# Altium PCB PCB1.PcbDoc (part 1 of 2)
Units mil, origin at the board's own origin, x right, y up, seen from the top; angles counter-clockwise.
Board outline 3200 x 1060 mil, 4 copper layers (Top Layer, Ground plane, Power plane, Bottom Layer); 179 components, 88 nets, 587 pads, 145 vias.
Unrouted connection lines stored in the file: 233.
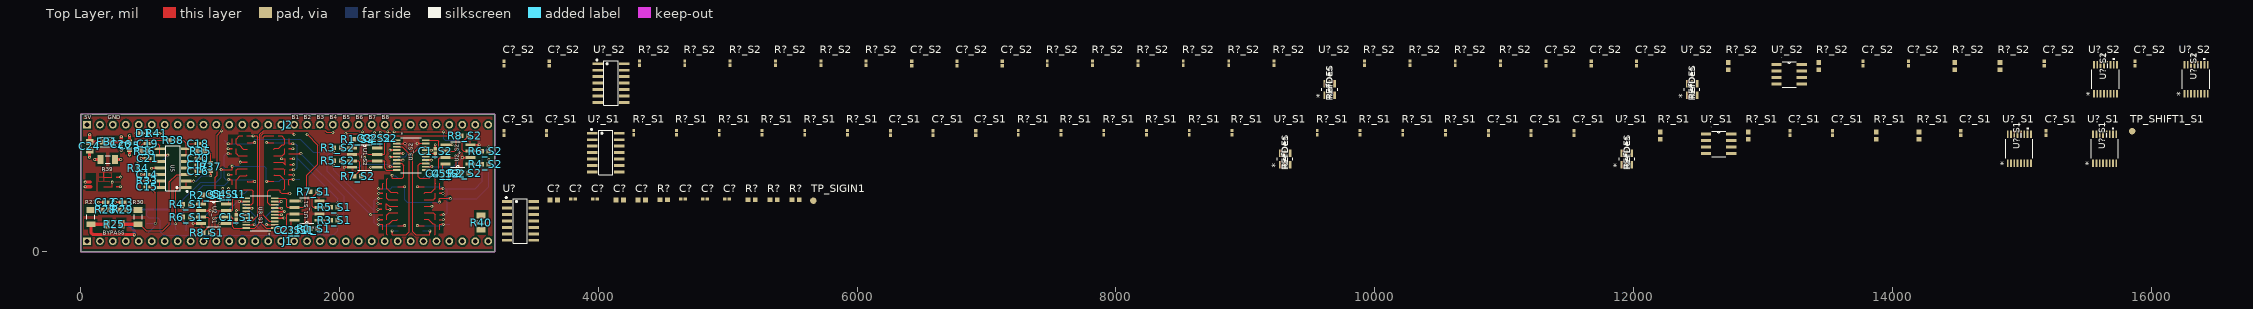
[diagram p0: Top Layer view]
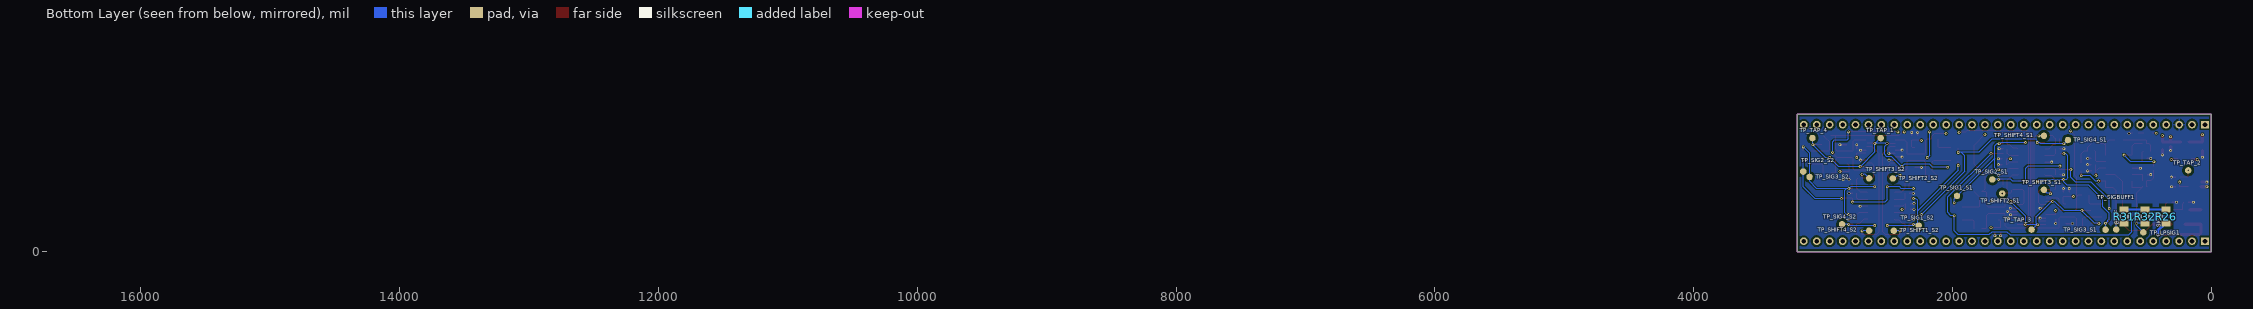
[diagram p1: Bottom Layer view, seen from below]
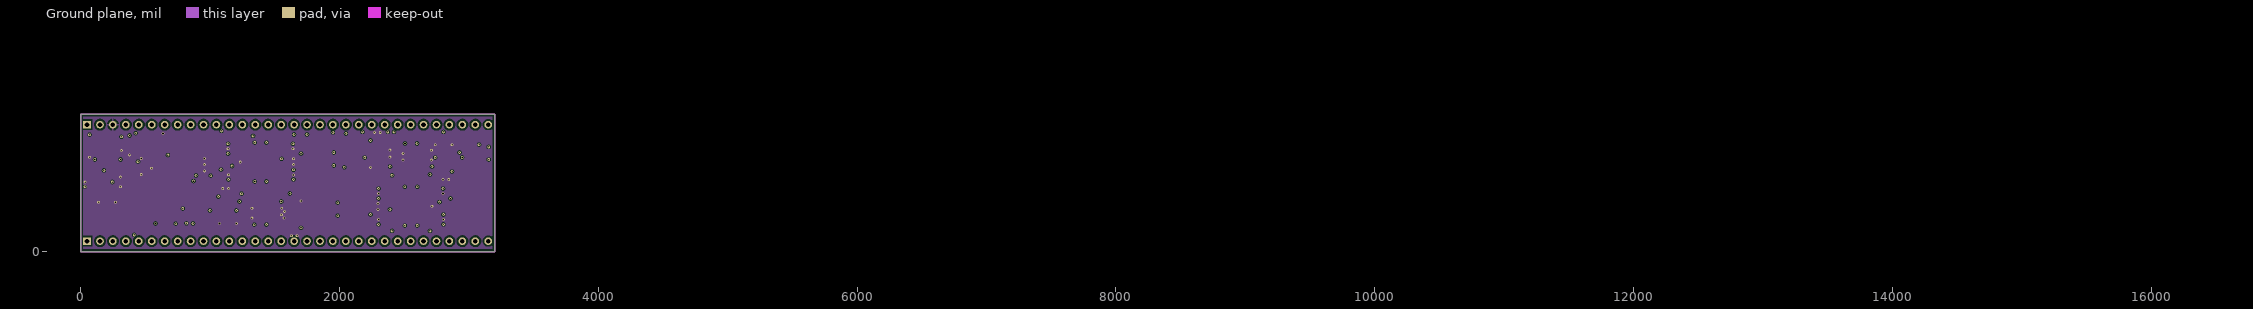
[diagram p2: Ground plane]
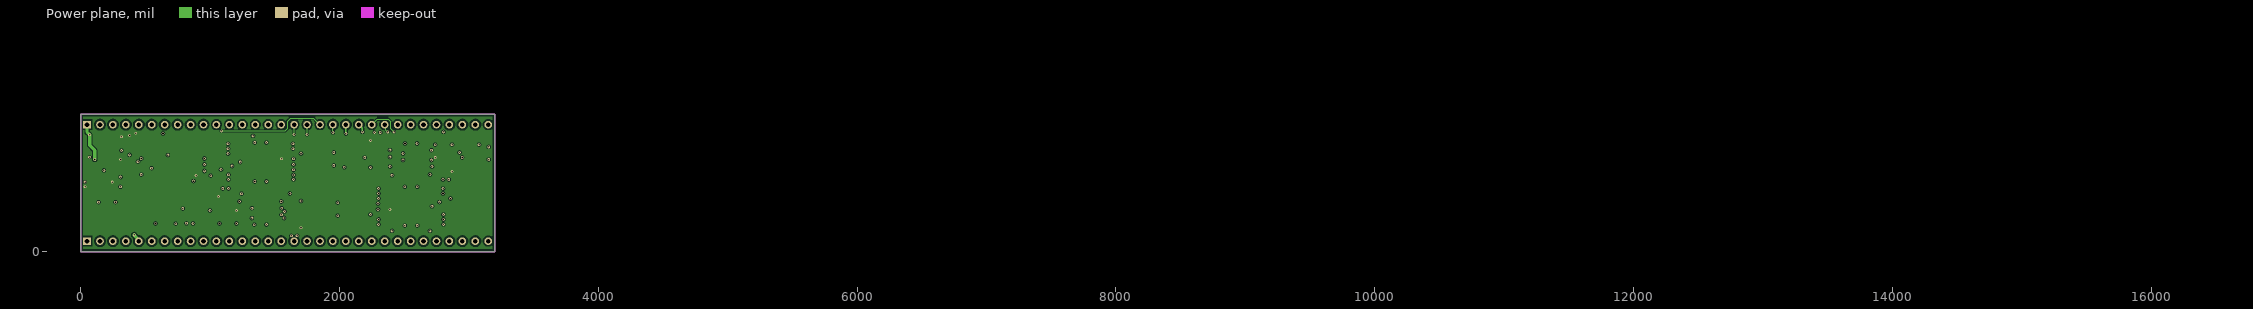
[diagram p3: Power plane]

## Layer stack, top to bottom
Top Solder: solder mask 0.4, Solder Resist, Dk 3.3
Top Layer: signal copper 1.4
Dielectric 1: prepreg 12.6, PP-006, Dk 4.1
Ground plane: signal copper 0.689
Dielectric1: core 12.6, FR-4, Dk 4.3
Power plane: signal copper 0.689
Dielectric 2: prepreg 12.6, PP-006, Dk 4.1
Bottom Layer: signal copper 1.4
Bottom Solder: solder mask 0.4, Solder Resist, Dk 3.3

## Board outline
0,0 3200,0 3200,1060 0,1060

## Design rules (kind name [scope] priority, off if disabled: settings)
Clearance Clearance_Poly_Via [InPoly vs IsVia] p1: gap=5 ignorepadtopadclearanceinfootprint=FALSE except(0: Arc-Hole Track-Hole SMDPad-Hole THPad-Hole Via-Hole Fill-Hole Poly-Hole Region-Hole Text-Hole)
Clearance Clearance_Poly_Poly [(InPoly) vs (InPoly)] p2: gap=15 ignorepadtopadclearanceinfootprint=FALSE except(0: Arc-Hole Track-Hole SMDPad-Hole THPad-Hole Via-Hole Fill-Hole Poly-Hole Region-Hole Text-Hole)
Clearance Clearance_Poly_Wires [InPoly vs IsWire] p3: gap=10 ignorepadtopadclearanceinfootprint=FALSE except(0: Arc-Hole Track-Hole SMDPad-Hole THPad-Hole Via-Hole Fill-Hole Poly-Hole Region-Hole Text-Hole)
Clearance Clearance_Poly_KO [(Layer = 'KeepOutLayer') vs (InPoly)] p4: gap=15 ignorepadtopadclearanceinfootprint=FALSE except(0: Arc-Hole Track-Hole SMDPad-Hole THPad-Hole Via-Hole Fill-Hole Poly-Hole Region-Hole Text-Hole)
Clearance Clearance_Poly_Top_Btm [OnLayer('Top Layer') or OnLayer('Bottom Layer') vs InPoly] p5: gap=20 ignorepadtopadclearanceinfootprint=FALSE except(0: Arc-Hole Track-Hole SMDPad-Hole THPad-Hole Via-Hole Fill-Hole Poly-Hole Region-Hole Text-Hole)
Clearance Clearance_KO_All [(Layer = 'KeepOutLayer')] p6: gap=0 ignorepadtopadclearanceinfootprint=FALSE
Clearance Clearance_Poly_All [(InPoly)] p7: gap=15 ignorepadtopadclearanceinfootprint=FALSE except(0: Arc-Hole Track-Hole SMDPad-Hole THPad-Hole Via-Hole Fill-Hole Poly-Hole Region-Hole Text-Hole)
Clearance Clearance_All [All] p8: gap=5 ignorepadtopadclearanceinfootprint=FALSE except(0: Arc-Hole Track-Hole SMDPad-Hole THPad-Hole Via-Hole Fill-Hole Poly-Hole Region-Hole Text-Hole)
ComponentClearance [All] p1 off: gap=10 collisioncheckmode=3 verticalgap=10 showdistances=FALSE
DiffPairsRouting [All] p1: maxlimit=10 minlimit=5 mostfreqgap=5 toplayer_minwidth=5 toplayer_maxwidth=25 toplayer_prefwidth=5 midlayer1_minwidth=5 midlayer1_maxwidth=25 midlayer1_prefwidth=5 midlayer2_minwidth=5 midlayer2_maxwidth=25 midlayer2_prefwidth=5 bottomlayer_minwidth=5 bottomlayer_maxwidth=25 bottomlayer_prefwidth=5 maxuncoupledlength=500
FabricationTestPointUsage TestPointUsage [All] p1 off: valid=0 allowmultiple=FALSE
FabricationTestpoint Testpoint [All] p1 off: side=3 testpointundercomponent=TRUE minsize=40 maxsize=100 preferedsize=60 minholesize=0 maxholesize=40 preferedholesize=32 testpointgrid=1 allowsidetop=TRUE allowsidebottom=TRUE usegrid=TRUE gridtolerance=0.01
FanoutControl Fanout_BGA [IsBGA] p1 off: bgadir=Out bgaviamode=Centered fanoutstyle=Auto fanoutdirection=Alternating viagrid=1 // Fanout_BGA (Default Rule)
FanoutControl Fanout_LCC [IsLCC] p2 off: bgadir=Out bgaviamode=Centered fanoutstyle=Auto fanoutdirection=Alternating viagrid=1 // Fanout_LCC (Default Rule)
FanoutControl Fanout_SOIC [IsSOIC] p3 off: bgadir=Out bgaviamode=Centered fanoutstyle=Auto fanoutdirection=Alternating viagrid=1 // Fanout_SOIC (Default Rule)
FanoutControl Fanout_Small [(CompPinCount < 5)] p4 off: bgadir=Out bgaviamode=Centered fanoutstyle=Auto fanoutdirection=OutThenIn viagrid=1 // Fanout_Small (Default Rule)
FanoutControl Fanout_Default [All] p5 off: bgadir=Out bgaviamode=Centered fanoutstyle=Auto fanoutdirection=Alternating viagrid=1 // Fanout_Default (Default Rule)
Height [All] p1 off: minheight=0 maxheight=1000 prefheight=500
HoleSize [All] p1 off: absolutevalues=TRUE maxlimit=100 minlimit=1 maxpercent=80.000 minpercent=20.000
HoleToHoleClearance [All] p1 off: gap=10 allowstackedmicrovias=TRUE
LayerPairs [All] p1 off: enforce=TRUE
MinimumSolderMaskSliver [All] p1 off: minsoldermaskwidth=10
NetAntennae [All] p1 off: netantennaetolerance=0
PasteMaskExpansion [All] p1 off: expansion=0
PlaneClearance [All] p1 off: clearance=20
PlaneConnect [All] p1 off: planeconnectstyle=Relief reliefexpansion=20 reliefentries=4 reliefconductorwidth=20 reliefairgap=15
PolygonConnect PolygonConnect_vias [All vs isVia] p1: connectstyle=Direct reliefconductorwidth=10 reliefentries=4 polygonreliefangle="90 Angle" airgapwidth=10
PolygonConnect [All] p2: connectstyle=Relief reliefconductorwidth=15 reliefentries=4 polygonreliefangle="90 Angle" airgapwidth=15
RoomDefinition S2 [InComponentClass('S2')] p1: confinementstyle=ConfineIn formatcopy=TRUE lockcomponents=FALSE outline 3245,1119 16508,1119 16508,1607 3245,1607
RoomDefinition S1 [InComponentClass('S1')] p2: confinementstyle=ConfineIn formatcopy=TRUE lockcomponents=FALSE outline 3245,582 16512,582 16512,1070 3245,1070
RoomDefinition CtDSP_IO [InComponentClass('CtDSP_IO')] p3: confinementstyle=ConfineIn formatcopy=TRUE lockcomponents=FALSE outline 3245,55 6142,55 6142,533 3245,533
RoutingCorners [All] p1 off: cornerstyle=45-Degree minsetback=100 maxsetback=100
RoutingLayers [All] p1 off: top layer_v5=FALSE mid layer 1_v5=TRUE mid layer 2_v5=TRUE bottom layer_v5=TRUE
RoutingPriority [All] p1 off: routingpriority=0
RoutingTopology [All] p1 off: topology=Shortest
RoutingVias [All] p1: holewidth=12 width=22 viastyle="Through Hole" minholewidth=6 minwidth=15 maxholewidth=50 maxwidth=50
SilkToSilkClearance [All] p1 off: silktosilkclearance=10
SilkToSolderMaskClearance SilkscreenOverComponentPads [IsPad] p1 off: minsilkscreentomaskgap=10 clearancetoexposedcopper=TRUE
SolderMaskExpansion SolderMaskExpansion_via [IsVia] p1: expansion=0 istentingtop=FALSE
SolderMaskExpansion [All] p2 off: expansion=4 istentingtop=FALSE
SupplyNets "Schematic Supply Nets_9" [InNet('+1.25L')] p1: voltage=0.000
SupplyNets "Schematic Supply Nets_8" [InNet('+2.5')] p2: voltage=0.000
SupplyNets "Schematic Supply Nets_7" [InNet('+2.5L')] p3: voltage=0.000
SupplyNets "Schematic Supply Nets_6" [InNet('+1.25')] p4: voltage=0.000
SupplyNets "Schematic Supply Nets_5" [InNet('+3.75L')] p5: voltage=0.000
SupplyNets "Schematic Supply Nets_4" [InNet('+3.75')] p6: voltage=0.000
SupplyNets "Schematic Supply Nets_3" [InNet('GND')] p7: voltage=0.000
SupplyNets "Schematic Supply Nets_2" [InNet('TAP')] p8: voltage=0.000
SupplyNets "Schematic Supply Nets_1" [InNet('+5')] p9: voltage=0.000
SupplyNets "Schematic Supply Nets" [InNet('+5IN')] p10: voltage=0.000
Width [All] p1: maxlimit=100 minlimit=5 preferedwidth=8
6 further rules are at their usual default settings.

## Classes and differential pairs
channel class CtDPS_Stage: S1 S2
component class S2: C1_S2 C2_S2 C3_S2 C4_S2 C5_S2 C?_S2 R1_S2 R2_S2 R3_S2 R4_S2 R5_S2 R6_S2 R7_S2 R8_S2 R?_S2 TP_SHIFT1_S2 TP_SHIFT2_S2 TP_SHIFT3_S2 TP_SHIFT4_S2 TP_SIG1_S2 TP_SIG2_S2 TP_SIG3_S2 TP_SIG4_S2 U1_S2 U2_S2 U3_S2 U?_S2
component class S1: C1_S1 C2_S1 C3_S1 C4_S1 C5_S1 C?_S1 R1_S1 R2_S1 R3_S1 R4_S1 R5_S1 R6_S1 R7_S1 R8_S1 R?_S1 TP_SHIFT1_S1 TP_SHIFT2_S1 TP_SHIFT3_S1 TP_SHIFT4_S1 TP_SIG1_S1 TP_SIG2_S1 TP_SIG3_S1 TP_SIG4_S1 U1_S1 U2_S1 U3_S1 U?_S1
component class CtDSP_IO: C12 C13 C14 C15 C16 C17 C18 C19 C20 C21 C24 C25 C26 C? D1 FB1 J1 J2 R25 R26 R27 R28 R29 R30 R31 R32 R33 R34 R35 R36 R37 R38 R39 R40 R41 R? TP_LPSIG1 TP_SIGBUFF1 TP_SIGIN1 TP_TAP_1 TP_TAP_2 TP_TAP_3 TP_TAP_4 U5 U?

## Components (designator, comment, footprint, x,y, rotation, side; value= is the part's Value field where it differs from the comment)
C1_S1 "100nF" C_0402 1203.61,266.54 r270 top (schematic designator C1)
C1_S2 "100nF" C_0402 2740.46,775.46 r90 top (schematic designator C1)
C2_S1 "100nF" C_0402 1628.61,166.28 r270 top (schematic designator C2)
C2_S2 "100nF" C_0402 2315.46,875.72 r90 top (schematic designator C2)
C3_S1 "2.2uF" C_0402 1673.61,166.28 r90 top (schematic designator C3)
C3_S2 "2.2uF" C_0402 2270.46,875.72 r270 top (schematic designator C3)
C4_S1 "100nF" C_0402 1143.61,441.54 r90 top (schematic designator C4)
C4_S2 "100nF" C_0402 2800.46,600.46 r270 top (schematic designator C4)
C5_S1 "2.2uF" C_0402 1098.61,441.54 r270 top (schematic designator C5)
C5_S2 "2.2uF" C_0402 2845.46,600.46 r90 top (schematic designator C5)
C12 "100nF" C_0402 195,380.88 r0 top
C13 "10nF" C_0402 325,380.88 r0 top
C14 "22nF" C_0402 515,594.03 r180 top locked
C15 "100nF" C_0402 515,499.21 r0 top locked
C16 "10uF" C_0402 910,620.25 r0 top locked
C17 "100nF" C_0402 910,669.63 r180 top locked
C18 "100nF" C_0402 910,834.01 r0 top locked
C19 "10nF" C_0402 517.36,834.01 r180 top locked
C20 "100nF" C_0402 910,719.01 r180 top locked
C21 "4.7nF" C_0402 517.36,719.01 r0 top locked
C24 "47uF" C_0805 70.21,813.95 r90 top
C25 "1uF" C_0603 379.07,816.45 r90 top
C26 "0.1uF" C_0402 314.88,829.05 r270 top
C? "100nF" C_0402 4825,407 r0 top
C? "100nF" C_0402 4995,407 r0 top
C? "10uF" C_0402 3804,407 r0 top
C? "100nF" C_0402 4655,407 r0 top
C? "100nF" C_0402 3974,407 r0 top
C? "1uF" C_0603 4337,397 r0 top
C? "1uF" C_0603 4166,397 r0 top
C? "1uF" C_0603 3656,397 r0 top
C?_S1 "100nF" C_0402 15187,916 r90 top (schematic designator C?)
C?_S1 "1pF" C_0402 3601,916 r90 top (schematic designator C?)
C?_S1 "100nF" C_0402 6587,916 r90 top (schematic designator C?)
C?_S1 "1pF" C_0402 3271,916 r90 top (schematic designator C?)
C?_S1 "10uF" C_0402 6917,916 r90 top (schematic designator C?)
C?_S1 "100nF" C_0402 11539,916 r90 top (schematic designator C?)
C?_S1 "1pF" C_0402 11208,916 r90 top (schematic designator C?)
C?_S1 "100nF" C_0402 6257,916 r90 top (schematic designator C?)
C?_S1 "100nF" C_0402 14527,916 r90 top (schematic designator C?)
C?_S1 "2.2uF" C_0402 13537,916 r90 top (schematic designator C?)
C?_S1 "100nF" C_0402 13207,916 r90 top (schematic designator C?)
C?_S1 "1pF" C_0402 10878,916 r90 top (schematic designator C?)
C?_S2 "1pF" C_0402 11673,1453 r90 top (schematic designator C?)
C?_S2 "100nF" C_0402 6772,1453 r90 top (schematic designator C?)
C?_S2 "100nF" C_0402 15173,1453 r90 top (schematic designator C?)
C?_S2 "100nF" C_0402 13773,1453 r90 top (schematic designator C?)
C?_S2 "100nF" C_0402 12023,1453 r90 top (schematic designator C?)
C?_S2 "100nF" C_0402 6422,1453 r90 top (schematic designator C?)
C?_S2 "1pF" C_0402 11323,1453 r90 top (schematic designator C?)
C?_S2 "10uF" C_0402 7122,1453 r90 top (schematic designator C?)
C?_S2 "1pF" C_0402 3271,1453 r90 top (schematic designator C?)
C?_S2 "100nF" C_0402 15873,1453 r90 top (schematic designator C?)
C?_S2 "2.2uF" C_0402 14123,1453 r90 top (schematic designator C?)
C?_S2 "1pF" C_0402 3621,1453 r90 top (schematic designator C?)
D1 "LED_0603" LED_6003 518.13,914.37 r180 top
FB1 "BLM18PG121SN1D" BLM18PG121SN1D 204.88,846.38 r0 top
J1 "DIP32" DIP32 50,80 r0 top
J2 "DIP32" DIP32 50,980 r0 top
R1_S1 "47k" RES_0603 1803.61,174.73 r180 top locked (schematic designator R1)
R1_S2 "47k" RES_0603 2140.46,867.27 r0 top (schematic designator R1)
R2_S1 "47k" RES_0603 973.61,436.54 r0 top (schematic designator R2)
R2_S2 "47k" RES_0603 2970.46,605.46 r180 top (schematic designator R2)
R3_S1 "75" RES_0603 1958.61,241.28 r180 top locked (schematic designator R3)
R3_S2 "75" RES_0603 1985.46,800.72 r0 top (schematic designator R3)
R4_S1 "75" RES_0603 818.61,366.54 r0 top (schematic designator R4)
R4_S2 "75" RES_0603 3125.46,675.46 r180 top (schematic designator R4)
R5_S1 "75" RES_0603 1958.61,341.28 r180 top locked (schematic designator R5)
R5_S2 "75" RES_0603 1985.46,700.72 r0 top (schematic designator R5)
R6_S1 "75" RES_0603 818.61,266.54 r0 top (schematic designator R6)
R6_S2 "75" RES_0603 3125.46,775.46 r180 top (schematic designator R6)
R7_S1 "47k" RES_0603 1803.61,461.54 r180 top locked (schematic designator R7)
R7_S2 "47k" RES_0603 2140.46,580.46 r0 top (schematic designator R7)
R8_S1 "47k" RES_0603 973.61,146.54 r0 top (schematic designator R8)
R8_S2 "47k" RES_0603 2970.46,895.46 r180 top (schematic designator R8)
R25 "0" RES_1206 260,210.76 r0 top
R26 "0" RES_1206 350,270.35 r90 bottom
R27 "0" RES_1206 80,265.88 r90 top
R28 "330" RES_0603 195,323.62 r0 top
R29 "3.3k" RES_0603 325,323.62 r0 top
R30 "0" RES_1206 445,265.88 r270 top
R31 "0" RES_1206 675,270.35 r90 bottom
R32 "0" RES_1206 512.5,270.35 r90 bottom
R33 "220" RES_0402 515,546.62 r180 top locked
R34 "470" RES_0402 444.14,643.52 r90 top locked
R35 "330" RES_0603 928.46,776.76 r180 top locked
R36 "2.2k" RES_0603 497.68,776.76 r180 top locked
R37 "150" RES_0603 1005,654.01 r90 top locked
R38 "3.3k" RES_0603 715,859.01 r0 top locked
R39 "0" RES_1206 209.88,711.15 r0 top
R40 "0" RES_1206 3094.53,222.96 r270 top
R41 "1k" RES_0402 587,913 r0 top
R? "1k" RES_0603 5355,399 r0 top
R? "1k" RES_0603 5525,399 r0 top
R? "1k" RES_0603 5185,399 r0 top
R? "1k" RES_0603 4506,399 r0 top
R?_S1 "47k" RES_0603 14205,896 r90 top (schematic designator R?)
R?_S1 "75" RES_0603 12885,896 r90 top (schematic designator R?)
R?_S1 "5K" RES_0402 7906,918 r90 top (schematic designator R?)
R?_S1 "10K" RES_0402 9886,918 r90 top (schematic designator R?)
R?_S1 "10K" RES_0402 4604,918 r90 top (schematic designator R?)
R?_S1 "10K" RES_0402 10546,918 r90 top (schematic designator R?)
R?_S1 "5K" RES_0402 8896,918 r90 top (schematic designator R?)
R?_S1 "75" RES_0603 13875,896 r90 top (schematic designator R?)
R?_S1 "10K" RES_0402 10216,918 r90 top (schematic designator R?)
R?_S1 "5K" RES_0402 8566,918 r90 top (schematic designator R?)
R?_S1 "5K" RES_0402 7575,918 r90 top (schematic designator R?)
R?_S1 "10K" RES_0402 4935,918 r90 top (schematic designator R?)
R?_S1 "5K" RES_0402 7245,918 r90 top (schematic designator R?)
R?_S1 "5K" RES_0402 5595,918 r90 top (schematic designator R?)
R?_S1 "5K" RES_0402 5925,918 r90 top (schematic designator R?)
R?_S1 "10K" RES_0402 5265,918 r90 top (schematic designator R?)
R?_S1 "5K" RES_0402 8236,918 r90 top (schematic designator R?)
R?_S1 "47k" RES_0603 12206,896 r90 top (schematic designator R?)
R?_S1 "10K" RES_0402 4274,918 r90 top (schematic designator R?)
R?_S1 "10K" RES_0402 9556,918 r90 top (schematic designator R?)
R?_S2 "10K" RES_0402 9921,1455 r90 top (schematic designator R?)
R?_S2 "10K" RES_0402 5370,1455 r90 top (schematic designator R?)
R?_S2 "5K" RES_0402 8520,1455 r90 top (schematic designator R?)
R?_S2 "5K" RES_0402 8170,1455 r90 top (schematic designator R?)
R?_S2 "10K" RES_0402 4319,1455 r90 top (schematic designator R?)
R?_S2 "5K" RES_0402 8871,1455 r90 top (schematic designator R?)
R?_S2 "5K" RES_0402 9221,1455 r90 top (schematic designator R?)
R?_S2 "47k" RES_0603 12731,1433 r90 top (schematic designator R?)
R?_S2 "5K" RES_0402 6070,1455 r90 top (schematic designator R?)
R?_S2 "75" RES_0603 14481,1433 r90 top (schematic designator R?)
R?_S2 "47k" RES_0603 14831,1433 r90 top (schematic designator R?)
R?_S2 "5K" RES_0402 7820,1455 r90 top (schematic designator R?)
R?_S2 "10K" RES_0402 10971,1455 r90 top (schematic designator R?)
R?_S2 "10K" RES_0402 4669,1455 r90 top (schematic designator R?)
R?_S2 "10K" RES_0402 10271,1455 r90 top (schematic designator R?)
R?_S2 "10K" RES_0402 5019,1455 r90 top (schematic designator R?)
R?_S2 "75" RES_0603 13431,1433 r90 top (schematic designator R?)
R?_S2 "5K" RES_0402 7470,1455 r90 top (schematic designator R?)
R?_S2 "10K" RES_0402 10621,1455 r90 top (schematic designator R?)
R?_S2 "5K" RES_0402 5720,1455 r90 top (schematic designator R?)
TP_LPSIG1 "TESTPOINT" TESTPOINT 526.22,148.05 r90 bottom
TP_SHIFT1_S1 "TESTPOINT" TESTPOINT 15852,930 r90 top (schematic designator TP_SHIFT1)
TP_SHIFT1_S2 "TESTPOINT" TESTPOINT 2454,161 r90 bottom (schematic designator TP_SHIFT1)
TP_SHIFT2_S1 "TESTPOINT" TESTPOINT 1616.98,448.44 r90 bottom (schematic designator TP_SHIFT2)
TP_SHIFT2_S2 "TESTPOINT" TESTPOINT 2461.46,564.5 r90 bottom (schematic designator TP_SHIFT2)
TP_SHIFT3_S1 "TESTPOINT" TESTPOINT 1294.53,476.54 r90 bottom (schematic designator TP_SHIFT3)
TP_SHIFT3_S2 "TESTPOINT" TESTPOINT 2645,565.46 r90 bottom (schematic designator TP_SHIFT3)
TP_SHIFT4_S1 "TESTPOINT" TESTPOINT 1294.53,893.92 r90 bottom (schematic designator TP_SHIFT4)
TP_SHIFT4_S2 "TESTPOINT" TESTPOINT 2645,161 r90 bottom (schematic designator TP_SHIFT4)
TP_SIG1_S1 "TESTPOINT" TESTPOINT 1965.98,429.52 r90 bottom (schematic designator TP_SIG1)
TP_SIG1_S2 "TESTPOINT" TESTPOINT 2262.19,200.4 r90 bottom (schematic designator TP_SIG1)
TP_SIG2_S1 "TESTPOINT" TESTPOINT 1693.29,556.8 r90 bottom (schematic designator TP_SIG2)
TP_SIG2_S2 "TESTPOINT" TESTPOINT 3154.01,617.79 r90 bottom (schematic designator TP_SIG2)
TP_SIG3_S1 "TESTPOINT" TESTPOINT 818,169 r90 bottom (schematic designator TP_SIG3)
TP_SIG3_S2 "TESTPOINT" TESTPOINT 3105.46,576.25 r90 bottom (schematic designator TP_SIG3)
TP_SIG4_S1 "TESTPOINT" TESTPOINT 1108.51,861.53 r90 bottom (schematic designator TP_SIG4)
TP_SIG4_S2 "TESTPOINT" TESTPOINT 2854.06,210.28 r90 bottom (schematic designator TP_SIG4)
TP_SIGBUFF1 "TESTPOINT" TESTPOINT 736,170 r90 bottom
TP_SIGIN1 "TESTPOINT" TESTPOINT 5662,393 r90 top
TP_TAP_1 "TESTPOINT" TESTPOINT 2555.86,876.73 r90 bottom
TP_TAP_2 "TESTPOINT" TESTPOINT 180.01,626.79 r90 bottom
TP_TAP_3 "TESTPOINT" TESTPOINT 1389.92,169.46 r90 bottom
TP_TAP_4 "TP_TAP_4" TESTPOINT 3083.02,876.73 r90 bottom
U1_S1 "TLV3502AIDR" TLV3502AIDR 1748.61,316.28 r180 top locked (schematic designator U1)
U1_S2 "TLV3502AIDR" TLV3502AIDR 2195.46,725.72 r0 top (schematic designator U1)
U2_S1 "TLV3502AIDR" TLV3502AIDR 1028.61,291.54 r0 top (schematic designator U2)
U2_S2 "TLV3502AIDR" TLV3502AIDR 2915.46,750.46 r180 top (schematic designator U2)
U3_S1 "ADG734BRUZ-REEL" ADG734BRUZ-REEL 1389.61,296.97 r180 top (schematic designator U3)
U3_S2 "ADG734BRUZ-REEL" ADG734BRUZ-REEL 2554.46,745.03 r0 top (schematic designator U3)
U5 "ADA4891-4ARZ-R7" ADA4891-4ARZ-R7 712.37,634.01 r180 top locked
U? "ADA4891-4ARZ-R7" ADA4891-4ARZ-R7 3400,247 r0 top
U?_S1 "ADG709BRUZ-REEL7" ADG709BRUZ-REEL7 14981,796 r90 top (schematic designator U?)
U?_S1 "ADG709BRUZ-REEL7" ADG709BRUZ-REEL7 15641,796 r90 top (schematic designator U?)
U?_S1 "TLV3502AIDR" TLV3502AIDR 12657,832 r0 top (schematic designator U?)
U?_S1 "SN74LVC1G386DBVR" SN74LVC1G386DBVR 11942,715 r90 top (schematic designator U?)
U?_S1 "SN74LVC1G386DBVR" SN74LVC1G386DBVR 9302,715 r90 top (schematic designator U?)
U?_S1 "ADA4891-4ARZ-R7" ADA4891-4ARZ-R7 4060,774 r0 top (schematic designator U?)
U?_S2 "SN74LVC1G386DBVR" SN74LVC1G386DBVR 9647,1252 r90 top (schematic designator U?)
U?_S2 "ADA4891-4ARZ-R7" ADA4891-4ARZ-R7 4100,1311 r0 top (schematic designator U?)
U?_S2 "TLV3502AIDR" TLV3502AIDR 13202,1369 r0 top (schematic designator U?)
U?_S2 "ADG709BRUZ-REEL7" ADG709BRUZ-REEL7 15647,1333 r90 top (schematic designator U?)
U?_S2 "SN74LVC1G386DBVR" SN74LVC1G386DBVR 12447,1252 r90 top (schematic designator U?)
U?_S2 "ADG709BRUZ-REEL7" ADG709BRUZ-REEL7 16347,1333 r90 top (schematic designator U?)

## Footprints (in the part's own frame and the unit in brackets; to place one, negate y for a bottom-side part, rotate by r counter-clockwise, add the part's x,y. Pads: shape width x height; smd on the part's side, far side on the other; paste and mask are expansions set on the pad)
ADA4891-4ARZ-R7 [mil]
  rect 80.24x22.6 smd: 1(-104.88,139.98) 2(-104.88,89.98) 3(-104.88,39.98) 4(-104.88,-10.02) 5(-104.88,-60.02) 6(-104.88,-110.02) 7(-104.88,-160.02) 8(101.34,-160.02) 9(101.34,-110.02) 10(101.34,-60.02) 11(101.34,-10.02) 12(101.34,39.98) 13(101.34,89.98) 14(101.34,139.98)
  silkscreen extent -117,-183 53,175, body extent -120,-180 116,161, height 69
ADG709BRUZ-REEL7 [mil]
  rect 58x14 smd paste+0 mask+0: 1(-112,90.57) 2(-112,64.98) 3(-112,39.39) 4(-112,13.8) 5(-112,-11.8) 6(-112,-37.39) 7(-112,-62.98) 8(-112,-88.57) 9(110,-88.57) 10(110,-62.98) 11(110,-37.39) 12(110,-11.8) 13(110,13.8) 14(110,39.39) 15(110,64.98) 16(110,90.57)
  silkscreen extent -73,-104 159,106, body extent -127,-100 125,102, height 47
ADG734BRUZ-REEL [mil]
  rect 58x14 smd: 1(-111,115.16) 2(-111,89.57) 3(-111,63.98) 4(-111,38.39) 5(-111,12.8) 6(-111,-12.8) 7(-111,-38.39) 8(-111,-63.98) 9(-111,-89.57) 10(-111,-115.16) 11(111,-115.16) 12(111,-89.57) 13(111,-63.98) 14(111,-38.39) 15(111,-12.8) 16(111,12.8) 17(111,38.39) 18(111,63.98) 19(111,89.57) 20(111,115.16)
  silkscreen extent -79,-135 79,135, body extent -126,-130 126,130, height 47
BLM18PG121SN1D [mil]
  rect 51.42x41.66 smd paste+0 mask+0: 1(-30.55,0) 2(30.55,0)
  silkscreen extent -56,-37 56,37, body extent -76,-41 76,41, height 10
C_0402 [mm]
  rect 0.66x0.62 smd paste+0 mask+0.051: 1(-0.44,0) 2(0.44,0)
  body extent -0.53,-0.28 0.53,0.28, height 0.55
C_0603 [mm]
  rect 1x0.95 smd: 1(-0.75,0) 2(0.75,0)
  body extent -0.85,-0.45 0.85,0.45, height 0.9
C_0805 [mm]
  rect 1.25x1.45 smd: 1(-0.825,0) 2(0.825,0)
  body extent -1.1,-0.72 1.1,0.72, height 1.45
DIP32 [mm]
  rect 1.5x1.5 hole 0.9: 1(0,0)
  round 1.5 hole 0.9: 2(2.54,0) 3(5.08,0) 4(7.62,0) 5(10.16,0) 6(12.7,0) 7(15.24,0) 8(17.78,0) 9(20.32,0) 10(22.86,0) 11(25.4,0) 12(27.94,0) 13(30.48,0) 14(33.02,0) 15(35.56,0) 16(38.1,0) 17(40.64,0) 18(43.18,0) 19(45.72,0) 20(48.26,0) 21(50.8,0) 22(53.34,0) 23(55.88,0) 24(58.42,0) 25(60.96,0) 26(63.5,0) 27(66.04,0) 28(68.58,0) 29(71.12,0) 30(73.66,0) 31(76.2,0) 32(78.74,0)
LED_6003 [mm]
  rect 0.8x0.8 smd: 1(0.004,0.009) 2(1.502,0.009)
  silkscreen extent 0.63,-0.31 0.97,0.37, body extent -0.05,-0.39 1.55,0.41, height 0.35
RES_0402 [mm]
  rect 0.65x0.55 smd paste+0 mask+0.05: 1(-0.425,0) 2(0.425,0)
  body extent -0.55,-0.28 0.55,0.28, height 0.35
RES_0603 [mm]
  rect 0.95x0.9 smd: 1(-0.725,0) 2(0.725,0)
  body extent -0.85,-0.45 0.85,0.45, height 0.55
RES_1206 [mm]
  rect 1.15x1.75 smd: 1(-1.4,0) 2(1.4,0)
  silkscreen extent -0.45,-0.77 0.45,0.77, body extent -1.63,-0.87 1.63,0.87, height 0.65
SN74LVC1G386DBVR [mil]
  rect 58x22 smd paste-29 mask-29: 1(-45,32.4) 2(-45,-5) 3(-45,-42.4) 4(43,-42.4) 5(43,-5) 6(43,32.4)
  silkscreen extent -10,-65 8,55, body extent -60,-65 58,55, height 57
TESTPOINT [mil]
  round 50 smd paste-99999 mask+0: 1(0,0)
TLV3502AIDR [mil]
  rect 78x22 smd: 1(-97,75) 2(-97,25) 3(-97,-25) 4(-97,-75) 5(97,-75) 6(97,-25) 7(97,25) 8(97,75)
  silkscreen extent -54,-98 54,98, body extent -122,-99 122,99, height 69

## Part data
C1_S1 C1_S2 C2_S1 C2_S2 C4_S1 C4_S2 C12 C15 C17 C18 C20 C26 C? C? C? C? C?_S1 C?_S1 C?_S1 C?_S1 C?_S1 C?_S1 C?_S2 C?_S2 C?_S2 C?_S2 C?_S2 C?_S2: library part C_0402, LCSC Part #=C1525
C3_S1 C3_S2 C5_S1 C5_S2 C?_S1 C?_S2: library part C_0402, LCSC Part #=C12530
C13 C19: library part C_0402, LCSC Part #=C15195
C14: library part C_0402, LCSC Part #=C1532
C16 C? C?_S1 C?_S2: library part C_0402, LCSC Part #=C15525
C21: library part C_0402, LCSC Part #=C1538
C24: library part C_0805, LCSC Part #=C16780
C25 C? C? C?: library part C_0603, LCSC Part #=C15849
C?_S1 C?_S1 C?_S1 C?_S1 C?_S2 C?_S2 C?_S2 C?_S2: library part C_0402, LCSC Part #=C1550
D1: LCSC Part #=C2286
FB1: "-55℃~+125℃ 1 120Ω@100MHz 2A 50mΩ ±25% 0603 Ferrite Beads ROHS", LCSC Part #=C14709
R1_S1 R1_S2 R2_S1 R2_S2 R7_S1 R7_S2 R8_S1 R8_S2 R?_S1 R?_S1 R?_S2 R?_S2: library part RES_0603, LCSC Part #=C25819
R3_S1 R3_S2 R4_S1 R4_S2 R5_S1 R5_S2 R6_S1 R6_S2 R?_S1 R?_S1 R?_S2 R?_S2: library part RES_0603, LCSC Part #=C4275
R25 R26 R27 R30 R31 R32 R39 R40: library part RES_1206, LCSC Part #=C17888
R28 R35: library part RES_0603, LCSC Part #=C23138
R29 R38: library part RES_0603, LCSC Part #=C22978
R33: library part RES_0402, LCSC Part #=C25091
R34: library part RES_0402, LCSC Part #=C25117
R36: library part RES_0603, LCSC Part #=C4190
R37: library part RES_0603, LCSC Part #=C22808
R41: library part RES_0402, LCSC Part #=C11702
R? R? R? R?: library part RES_0603, LCSC Part #=C5123612
R?_S1 R?_S1 R?_S1 R?_S1 R?_S1 R?_S1 R?_S1 R?_S1 R?_S2 R?_S2 R?_S2 R?_S2 R?_S2 R?_S2 R?_S2 R?_S2: library part RES_0402, LCSC Part #=C5948099
R?_S1 R?_S1 R?_S1 R?_S1 R?_S1 R?_S1 R?_S1 R?_S1 R?_S2 R?_S2 R?_S2 R?_S2 R?_S2 R?_S2 R?_S2 R?_S2: library part RES_0402, LCSC Part #=C25744
TP_TAP_4: library part TESTPOINT
U1_S1 U1_S2 U2_S1 U2_S2 U?_S1 U?_S2: "Dual 4.5ns Push-pull Rail-to-Rail Input, Rail-to-Rail Output TTL Comparators", LCSC Part #=C131165
U3_S1 U3_S2: LCSC Part #=C579105
U5 U? U?_S1 U?_S2: "Quad Rail-to-Rail Op-Amp, 240 MHz, 170 V/µs, SOT-23-5", LCSC Part #=C654290
U?_S1 U?_S1 U?_S2 U?_S2: "CMOS Low Voltage, 3 Î© 4-Channel Multiplexer"
U?_S1 U?_S1 U?_S2 U?_S2: "Single 3-input, 1.65-V to 5.5-V XOR (exclusive OR) gate 6-SOT-23 -40 to 125"

## Via types
v1: diameter 22, hole 12, Top Layer to Bottom Layer, tented both sides, 137 vias
v2: diameter 22, hole 12, Top Layer to Bottom Layer, 8 vias

## Nets (pads, with @x,y where several pads share a name; then routed paths per layer and width w, separated by ;. In a path a pad name is that pad's centre, name@x,y a point inside that pad or via, vN(x,y) a via of type N, cw(c..) or ccw(c..) an arc to the next point about the centre after c; other vN are vias at no path point)
+1.25: C?.2@3685.53,397 U1_S1.2 U1_S2.2 U?.6 U?.7 U?_S1.2@12560,857 U?_S1.5@14992.79,684 U?_S1.5@15652.79,684 U?_S2.2@13105,1394 U?_S2.5@15658.79,1221 U?_S2.5@16358.79,1221
+1.25L: C?.2@5012.32,407 R?.1@5496.46,399 R?.2@5383.54,399 U?.5
+2.5: C?.1@4307.47,397 U1_S1.4 U1_S2.4 U?.13 U?.14 U?_S1.4@12560,757 U?_S1.6@15018.39,684 U?_S1.6@15678.39,684 U?_S2.4@13105,1294 U?_S2.6@15684.39,1221 U?_S2.6@16384.39,1221
+2.5L: C?.2@4842.32,407 R?.1@5326.46,399 R?.2@5213.54,399 U?.12
+3.75: C?.1@4136.47,397 U2_S1.2 U2_S1.4 U2_S2.2 U2_S2.4 U?.1 U?.2 U?_S1.7@15043.98,684 U?_S1.7@15703.98,684 U?_S2.7@15709.98,1221 U?_S2.7@16409.98,1221
+3.75L: C?.2@4672.32,407 R?.1@5156.46,399 R?.2@4534.54,399 U?.3
+5: C1_S1.1 C1_S2.1 C2_S1.1 C2_S2.1 C3_S1.2 C3_S2.2 C4_S1.1 C4_S2.1 C5_S1.2 C5_S2.2 C16.1 C17.2 C25.2 C26.1 C?.1@3786.68,407 C?.2@3991.32,407 C?_S1.1@6257,898.68 C?_S1.1@6587,898.68 C?_S1.1@11539,898.68 C?_S1.1@13207,898.68 C?_S1.1@14527,898.68 C?_S1.1@15187,898.68 C?_S1.2@6917,933.32 C?_S1.2@13537,933.32 C?_S2.1@6422,1435.68 C?_S2.1@6772,1435.68 C?_S2.1@12023,1435.68 C?_S2.1@13773,1435.68 C?_S2.1@15173,1435.68 C?_S2.1@15873,1435.68 C?_S2.2@7122,1470.32 C?_S2.2@14123,1470.32 D1.2 FB1.2 R39.2 R?.1@4477.46,399 U1_S1.8 U1_S2.8 U2_S1.8 U2_S2.8 U3_S1.16 U3_S2.16 U5.4 U?.4 U?_S1.2@14916.02,684 U?_S1.2@15576.02,684 U?_S1.4@3955.12,763.98 U?_S1.5@9307,758 U?_S1.5@11947,758 U?_S1.8@12754,907 U?_S1.14@14941.61,906 U?_S1.14@15601.61,906 U?_S2.2@15582.02,1221 U?_S2.2@16282.02,1221 U?_S2.4@3995.12,1300.98 U?_S2.5@9652,1295 U?_S2.5@12452,1295 U?_S2.8@13299,1444 U?_S2.14@15607.61,1443 U?_S2.14@16307.61,1443 | length 1286.6
  Top Layer w8: v1(426,914) D1.2@459,914 ; U5.4@817.25,644.03 869.37,644.03 882.46,630.94 882.46,630.78 C16.1@890.67,622.58 ; v1(892.68,587) C16.1@892.68,620.25 ; C16.1@892.68,623.8 C17.2@892.68,669.63 C17.2@892.68,671.96 ; v1(1064.54,424.21) C5_S1.2@1098.61,424.21 C4_S1.1@1143.61,424.21 1143.61,373.54 1136.61,366.54 U2_S1.8@1125.61,366.54 ; v1(1203.61,316.54) C1_S1.1@1203.61,283.86 1203.92,284.17 U3_S1.16@1278.61,284.17 ; U1_S1.8@1651.61,241.28 1635.61,241.28 1628.61,234.28 C2_S1.1@1628.61,183.6 C3_S1.2@1673.61,183.6 v1(1703.27,183.6) ; v1(2240.8,858.4) C3_S2.2@2270.46,858.4 C2_S2.1@2315.46,858.4 2315.46,807.72 2308.46,800.72 U1_S2.8@2292.46,800.72 ; U3_S2.16@2665.46,757.83 2740.15,757.83 C1_S2.1@2740.46,758.14 v1(2740.46,725.46) ; U2_S2.8@2818.46,675.46 2807.46,675.46 2800.46,668.46 C4_S2.1@2800.46,617.79 C5_S2.2@2845.46,617.79 v1(2870.46,617.79)
  Top Layer w25: FB1.2@235.44,846.38 C26.1@314.88,846.38 ; R39.2@265.09,711.06 v1(309.88,711.06) ; v1(315.18,886.57) 314.88,886.28 C26.1@314.88,846.38 ; v1(379.07,896.57) C25.2@379.07,845.98 378.67,846.38 C26.1@314.88,846.38
+5IN: C24.2 FB1.1 J2.1 R39.1 | length 498.7
  Top Layer w25: C24.2@70.21,846.43 v1@70.21,902.43 ; C24.2@70.21,846.43 FB1.1@174.33,846.38 ; v1(109.88,711.06) R39.1@154.68,711.06
  Power plane w25: J2.1@50,980 50,922.69 v1(70.24,902.45) 70.24,820.76 109.58,781.42 109.58,711.36 v1(109.88,711.06)
B1: J2.17 U3_S1.1 | length 1641.9
  Top Layer w8: v2(1650,904.75) 1637.75,917 1414.69,917 1396.99,899.3 1396.99,218.3 1433.48,181.81 U3_S1.1@1500.61,181.81 1574.73,181.81 1593.61,200.69 1593.61,286.02 1598.86,291.28 1726.12,291.28 1737.73,279.67 1737.73,180.61 1743.61,174.73 1775.06,174.73
  Power plane w8: J2.17@1649,1005 1650,1004 v2(1650,904.75)
B2: J2.18 U3_S1.10 U?_S1.16@15550.43,906 | length 1065.4
  Top Layer w8: U3_S1.10@1500.61,412.13 1580.44,412.13 1593.61,398.96 1593.61,346.54 1598.86,341.28 1651.61,341.28 1722.42,341.28 1737.73,356.59 1737.73,455.65 1743.61,461.54 1774.08,461.54 ; v1(1750,904.75) 1832.15,822.6 1832.15,672.58 1748.61,589.03 1748.61,487.01 1774.08,461.54 ; 1775.06,461.54 1774.08,461.54
  Power plane w8: J2.18@1749,1005 1750,1004 v1(1750,904.75)
B3: J2.19 U3_S1.11 | length 1849
  Top Layer w8: 1002.15,436.54 1033.61,436.54 1039.49,430.65 ; v2(1087.78,932.25) 1087.49,932.25 1055.48,900.24 1055.48,589.99 1039.49,573.99 1039.49,430.65 ; U3_S1.11@1278.61,412.13 1185.4,412.13 1176.11,402.84 1176.11,324.04 1168.61,316.54 1125.61,316.54 1054.54,316.54 1039.49,331.59 1039.49,430.65
  Power plane w8: v2(1087.78,932.25) 1580.62,932.25 1600,951.63 1600,1008 1623,1031 1799,1031 J2.19@1850,980
B4: J2.20 U3_S1.20 | length 1931.7
  Top Layer w8: 1002.15,146.54 1033.61,146.54 1039.49,152.42 1039.49,251.48 1054.54,266.54 1125.61,266.54 1168.61,266.54 1176.11,259.04 1176.11,191.1 1185.4,181.81 U3_S1.20@1278.61,181.81 1344.84,181.81 1383.99,220.96 1383.99,904.69 1414.3,935 1889.39,935 1903.45,920.94 1949.53,920.94 v2(1950,920.46)
  Power plane w8: v2(1950,920.46) J2.20@1950,980 J2.20@1950,1003.14
B5: J2.21 U3_S2.1 | length 716.4
  Top Layer w8: v1(2050,911.64) 2140.22,911.64 2159.55,892.3 2159.55,876.73 2169.01,867.27 2200.46,867.27 2206.34,861.39 2206.34,762.33 2217.95,750.72 2292.46,750.72 2345.21,750.72 2350.46,755.98 2350.46,841.31 2369.34,860.19 U3_S2.1@2443.46,860.19
  Power plane w10: J2.21@2049,1005 2049.5,1004.5 2049.5,912.14 v1(2050,911.64)
B6: J2.22 U3_S2.10 U?_S2.16@16256.43,1443 | length 777.2
  Top Layer w8: 2169.01,580.46 2200.46,580.46 2206.34,586.35 2206.34,685.41 2221.66,700.72 ; v2(2195.46,725.72) 2220.46,700.72 2221.66,700.72 ; U3_S2.10@2443.46,629.87 2363.63,629.87 2350.46,643.04 2350.46,695.46 2345.21,700.72 2292.46,700.72 2221.66,700.72
  Power plane w10: J2.22@2149,1005 2149.5,1004.5 J2.22@2149.5,980 ; J2.22@2150,980 2150,976.69 2175.69,951 2175.69,926.55 v2(2177.98,924.25)
  Bottom Layer w8: v2(2177.98,924.25) 2177.98,743.2 v2(2195.46,725.72)